# Altium PCB 头部位置编码器-V4.1.PcbDoc
Units mm, origin at the board's own origin, x right, y up, seen from the top; angles counter-clockwise.
Board outline 20 x 28 mm, 2 copper layers (Top Layer, Bottom Layer); 10 components, 10 nets, 34 pads, 16 vias.
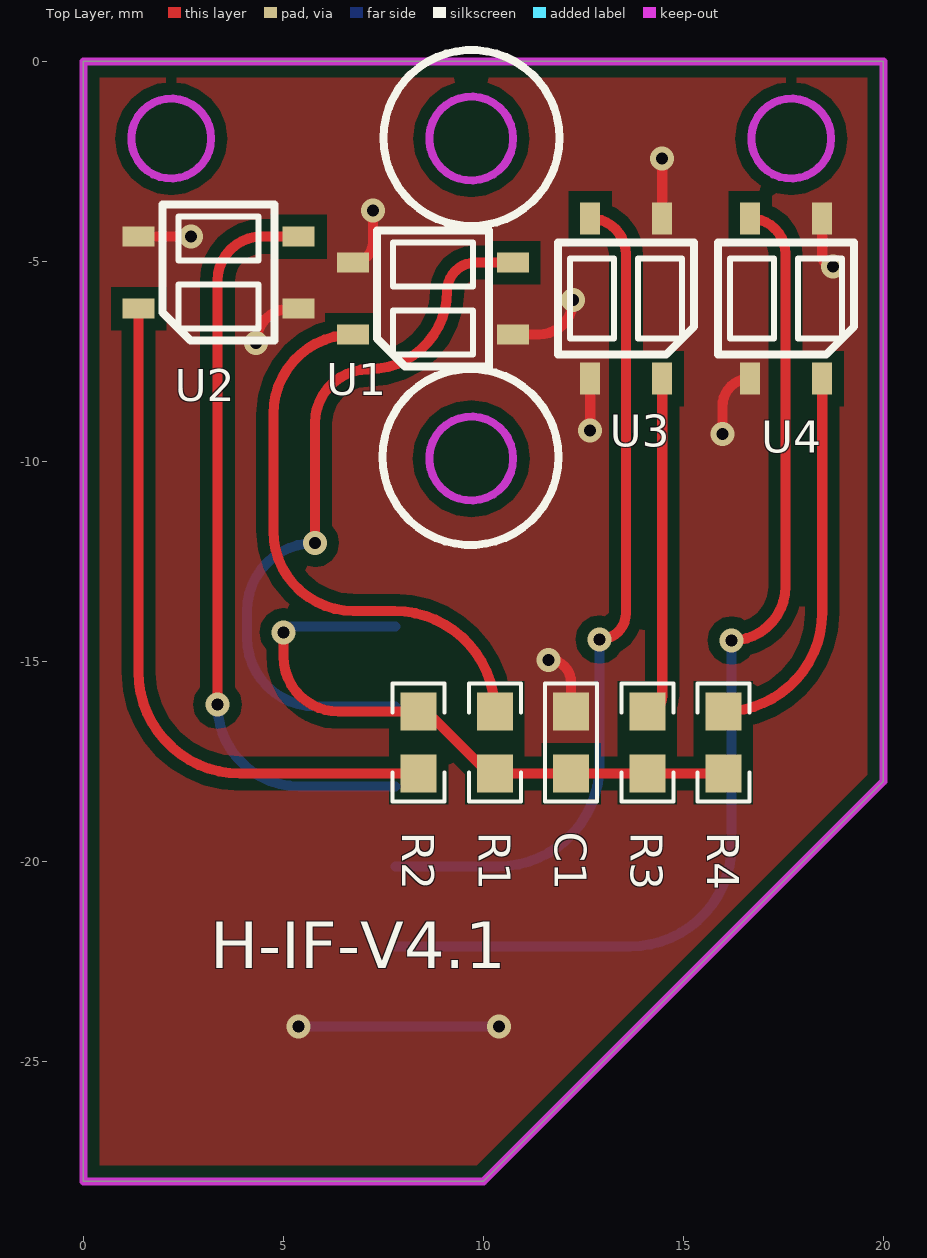
[diagram p0: Top Layer view]
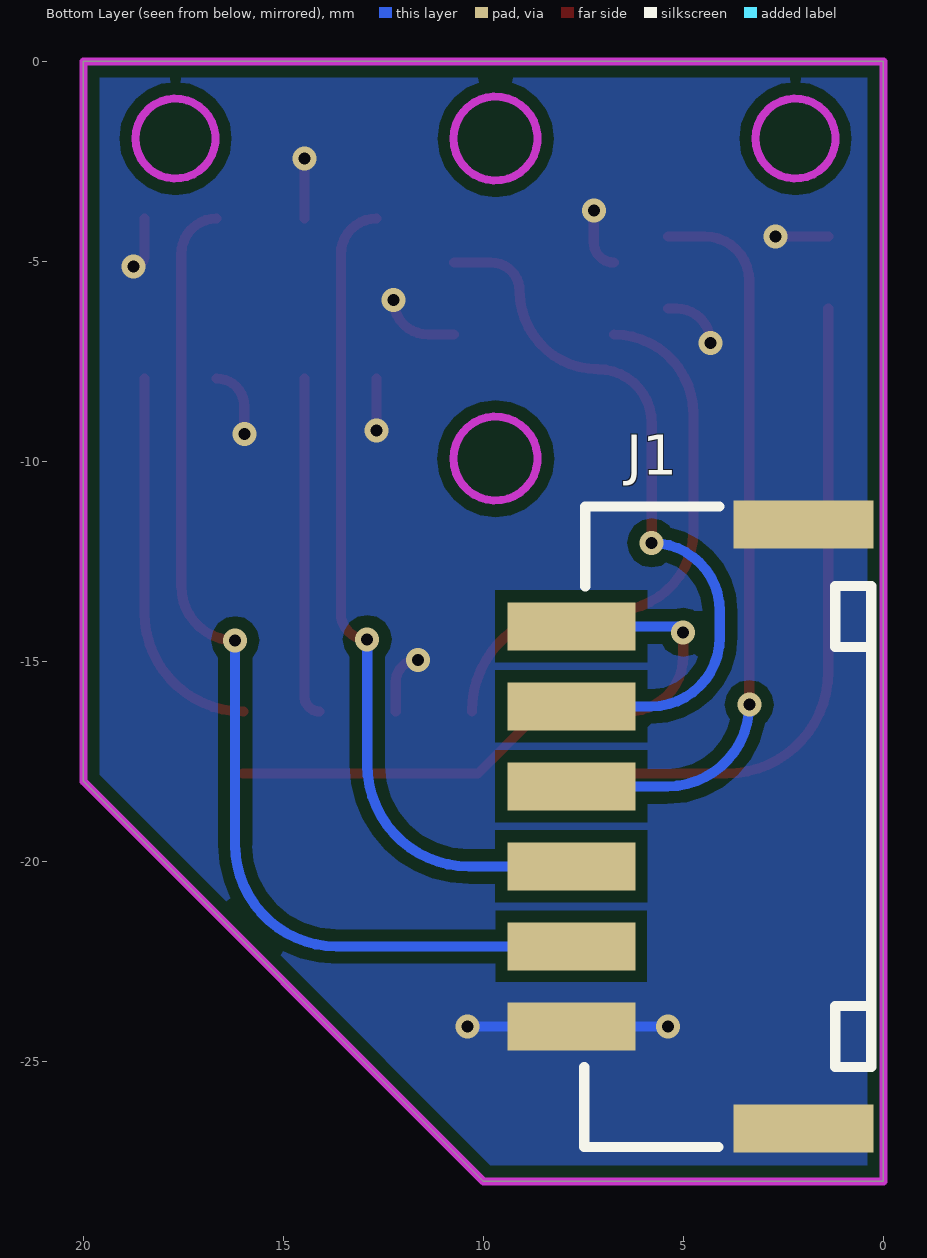
[diagram p1: Bottom Layer view, seen from below]

## Layer stack, top to bottom
Top Layer: signal copper 0.0356
Dielectric: dielectric 0.32, FR-4, Dk 4.8
Bottom Layer: signal copper 0.0356

## Board outline
0,-28 0,0 20,0 20,-17.998 9.998,-28

## Design rules (kind name [scope] priority, off if disabled: settings)
Clearance [All] p1: gap=0.3
FabricationTestpoint [(IsPad And (OnTopLayer Or OnBottomLayer))] p1: side=3 testpointundercomponent=TRUE minsize=1.016 maxsize=2.54 preferedsize=1.524 minholesize=0 maxholesize=1.016 preferedholesize=0.813 testpointgrid=0.025 allowsidetop=TRUE allowsidebottom=TRUE usegrid=TRUE gridtolerance=0
PlaneConnect [All] p1: planeconnectstyle=Direct reliefexpansion=0.508 reliefentries=4 reliefconductorwidth=0.254 reliefairgap=0.254
PolygonConnect [All] p1: connectstyle=Direct reliefconductorwidth=0.254 reliefentries=4 polygonreliefangle="90 Angle"
RoutingVias [All] p1: holewidth=0.3 width=0.6 viastyle="Through Hole" minholewidth=0.3 minwidth=0.6 maxholewidth=0.3 maxwidth=0.6
SilkscreenOverComponentPads [All] p1: minsilkscreentomaskgap=0.254
SolderMaskExpansion [All] p1: expansion=0.102
Width [All] p1: maxlimit=0.254 minlimit=0.254 preferedwidth=0.254
25 further rules are at their usual default settings.

## Components (designator, comment, footprint, x,y, rotation, side; value= is the part's Value field where it differs from the comment)
C1 "C0603" C0603_M1608 12.192,-17.028 r90 top
J1 "PH-AWB-6P" PH-AWB-6P 4.902,-19.126 r270 bottom
R1 "R0603" R0603_M1608 10.287,-17.028 r270 top
R2 "R0603" R0603_M1608 8.382,-17.028 r90 top
R3 "R0603" R0603_M1608 14.097,-17.028 r270 top
R4 "R0603" R0603_M1608 16.002,-17.028 r270 top
U1 "ITR8307-A" ITR8307 8.738,-5.928 r0 top
U2 "ITR8307-B" ITR8307 3.378,-5.278 r0 top
U3 "ITR8307-R" ITR8307 13.571,-5.928 r90 top
U4 "ITR8307-L" ITR8307 17.571,-5.928 r90 top

## Footprints (in the part's own frame and the unit in brackets; to place one, negate y for a bottom-side part, rotate by r counter-clockwise, add the part's x,y. Pads: shape width x height; smd on the part's side, far side on the other; paste and mask are expansions set on the pad)
C0603_M1608 [mm] "Chip Capacitor,"
  rect 0.95x0.9 smd: 1(-0.775,0) 2(0.775,0)
  silkscreen extent -1.48,-0.65 1.48,0.65, body extent -0.85,-0.45 0.85,0.45, height 0.55
ITR8307 [mm]
  rect 0.8x0.5 smd: 1(2,-0.9) 2(-2,-0.9) 3(2,0.9) 4(-2,0.9)
  silkscreen extent -1.4,-1.7 1.4,1.7
PH-AWB-6P [mm]
  rect 1.2x3.5 smd: 0(-7.55,2.9) 0(7.55,2.9)
  rect 1.2x3.2 smd: 1(5,-2.9) 2(3,-2.9) 3(1,-2.9) 4(-1,-2.9) 5(-3,-2.9) 6(-5,-2.9)
  silkscreen extent -8,-2.58 8.01,4.6
R0603_M1608 [mm]
  rect 0.95x0.9 smd: 1(-0.775,0) 2(0.775,0)
  silkscreen extent -1.48,-0.65 1.48,0.65, body extent -0.85,-0.45 0.85,0.45, height 0.55

## Part data
C1: library part Cap, "Capacitor"
J1: library part PH2.0-6P, "H"
R1 R2 R3 R4: library part Res1, "Resistor"

## Via types
v1: diameter 0.6, hole 0.3, Top Layer to Bottom Layer, tented both sides, 16 vias

## Nets (pads, with @x,y where several pads share a name; then routed paths per layer and width w, separated by ;. In a path a pad name is that pad's centre, name@x,y a point inside that pad or via, vN(x,y) a via of type N, cw(c..) or ccw(c..) an arc to the next point about the centre after c; other vN are vias at no path point)
GND: C1.2 J1.0 J1.1 U1.1 U1.4 U2.1 U2.4 U3.1 U3.4 U4.1 U4.4 | length 19.2
  Top Layer w0.254: U2.4 v1(2.692,-4.378) ; v1(4.318,-7.036) cw(c5.175,-7.036) 5.175,-6.178 U2.1 ; v1@5.334,-24.079 ccw(c5.381,-24.079) v1(5.381,-24.126) ; U1.4 ccw(c6.738,-4.527) 7.239,-4.527 v1(7.239,-3.734) ; v1(10.392,-24.126) ccw(c10.392,-24.105) v1@10.414,-24.105 ; U1.1 11.383,-6.828 ccw(c11.383,-5.969) v1(12.243,-5.969) ; v1(11.633,-14.961) cw(c11.633,-15.519) 12.192,-15.519 C1.2 ; v1(12.671,-9.224) U3.4 ; U3.1 v1(14.471,-2.431) ; v1(15.977,-9.322) 15.977,-8.622 cw(c16.671,-8.622) U4.4 ; U4.1 18.471,-4.856 ccw(c18.745,-4.856) v1(18.745,-5.131)
  Bottom Layer w0.254: v1(5.381,-24.126) J1.1 v1(10.392,-24.126) ; v1@12.649,-9.246 ccw(c12.649,-9.224) v1(12.671,-9.224) ; v1@14.453,-2.413 cw(c14.453,-2.431) v1(14.471,-2.431)
NetJ1_2: J1.2 U4.3 | length 26.8
  Top Layer w0.254: v1(16.205,-14.478) ccw(c16.205,-13.132) 17.551,-13.132 17.551,-4.809 ccw(c16.671,-4.809) U4.3
  Bottom Layer w0.254: J1.2 13.665,-22.126 ccw(c13.665,-19.586) 16.205,-19.586 v1(16.205,-14.478)
NetJ1_3: J1.3 U3.3 | length 21.1
  Top Layer w0.254: U3.3 cw(c12.671,-4.821) 13.564,-4.821 13.564,-13.792 cw(c12.903,-13.792) v1(12.903,-14.453)
  Bottom Layer w0.254: J1.3 10.363,-20.126 ccw(c10.363,-17.586) 12.903,-17.586 v1(12.903,-14.453)
NetJ1_4: J1.4 U2.3 | length 18.9
  Top Layer w0.254: v1(3.353,-16.078) 3.353,-5.486 cw(c4.461,-5.486) 4.461,-4.378 U2.3
  Bottom Layer w0.254: v1(3.353,-16.078) ccw(c5.401,-16.078) 5.401,-18.126 J1.4
NetJ1_5: J1.5 U1.3 | length 18.3
  Top Layer w0.254: v1(5.791,-12.04) 5.791,-9.042 cw(c7.137,-9.042) 7.137,-7.696 ccw(c7.137,-5.74) 9.093,-5.74 cw(c9.805,-5.74) 9.805,-5.028 U1.3
  Bottom Layer w0.254: v1(5.791,-12.04) ccw(c5.791,-13.741) 4.089,-13.741 4.089,-14.402 ccw(c5.814,-14.402) 5.814,-16.126 J1.5
NetR1_1: R1.1 U1.2 | length 14.2
  Top Layer w0.254: U1.2 ccw(c6.738,-8.816) 4.75,-8.816 4.75,-11.735 ccw(c6.756,-11.735) 6.756,-13.741 7.775,-13.741 cw(c7.775,-16.253) R1.1
NetR2_1: R2.1 U2.2 | length 17.5
  Top Layer w0.254: U2.2 1.378,-15.263 ccw(c3.918,-15.263) 3.918,-17.803 R2.1
NetR3_1: R3.1 U3.2 | length 8.5
  Top Layer w0.254: R3.1 ccw(c14.097,-15.88) 14.471,-15.88 U3.2
NetR4_1: R4.1 U4.2 | length 9.7
  Top Layer w0.254: R4.1 ccw(c16.002,-13.785) 18.471,-13.785 U4.2
VDD: C1.1 J1.6 R1.2 R2.2 R3.2 R4.2 | length 15.9
  Top Layer w0.254: v1(5.004,-14.275) 5.004,-14.882 ccw(c6.375,-14.882) 5.727,-16.09 ccw(c6.375,-14.882) 6.375,-16.253 R2.2 8.582,-16.253 10.132,-17.803 R1.2 C1.1 R3.2 R4.2
  Bottom Layer w0.254: v1(5.004,-14.275) cw(c5.152,-14.275) 5.152,-14.126 J1.6

## Polygon pours and split planes (outlines as drawn)
GND on Top Layer "Bottom Layer-No Net" (solid, remove dead copper, pour order 4): -1.956,2.184 22.682,2.184 cw(c22.682,1.448) 23.419,1.448 23.419,-9.982 ccw(c23.52,-9.982) 23.52,-10.084 23.52,-26.746 cw(c20.98,-26.746) 20.98,-29.286 2.388,-29.286 0.076,-29.286 cw(c0.076,-27.356) -1.854,-27.356
GND on Bottom Layer "Bottom Layer-No Net" (solid, remove dead copper, pour order 6): -0.965,2.464 20.142,2.464 cw(c20.142,0.584) 22.022,0.584 22.022,-26.289 cw(c19.482,-26.289) 19.482,-28.829 3.835,-28.829 1.346,-28.829 cw(c1.346,-26.289) -1.194,-26.289 -1.194,-25.959

## Keep-outs
Keep-Out Layer:
  circle w0.2: c2.197,-1.929 r1
  circle w0.2: c17.697,-1.929 r1
  circle w0.2: c9.697,-9.929 r1.05
  circle w0.2: c9.697,-1.929 r1.05
  lines w0.2: 0,-28 0,0 20,0 20,-17.998 9.998,-28 0,-28

## Silkscreen, mask and mechanical layers (free items; w line width, h text height)
Top Overlay:
  circle w0.2: c9.677,-9.891 r2.2
  circle w0.2: c9.703,-1.915 r2.2
  text "H-IF-V4.1" at 3.175,-23.063 h2